# Altium PCB AUC3_V1.3_170103.PcbDoc
Units mm, origin at the board's own origin, x right, y up, seen from the top; angles counter-clockwise.
Board outline 47.4 x 19 mm, 4 copper layers (Top Layer, Mid-Layer 1, Mid-Layer 2, Bottom Layer); 54 components, 40 nets, 162 pads, 93 vias.
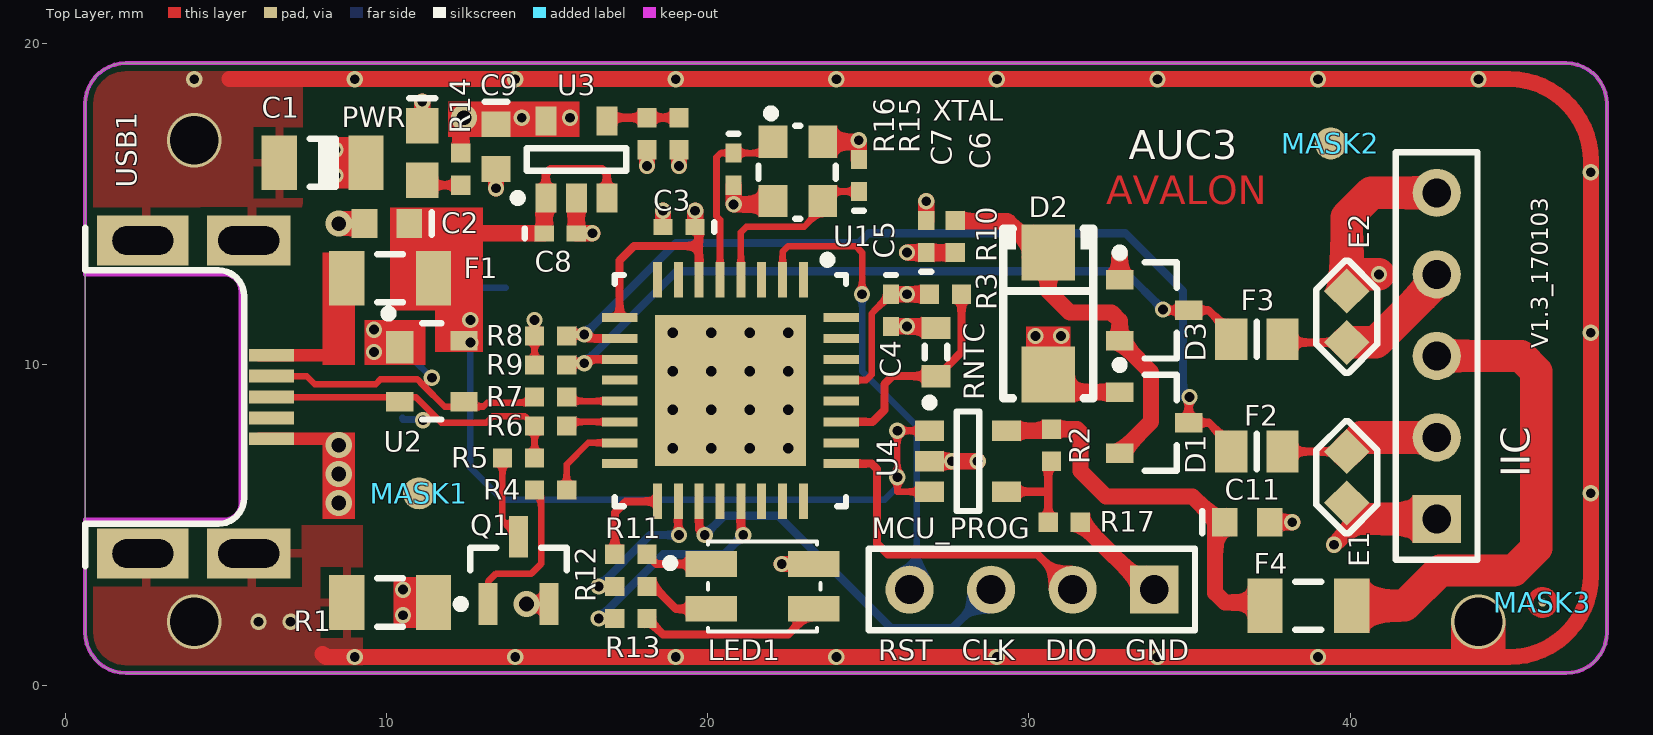
[diagram p0: Top Layer view]
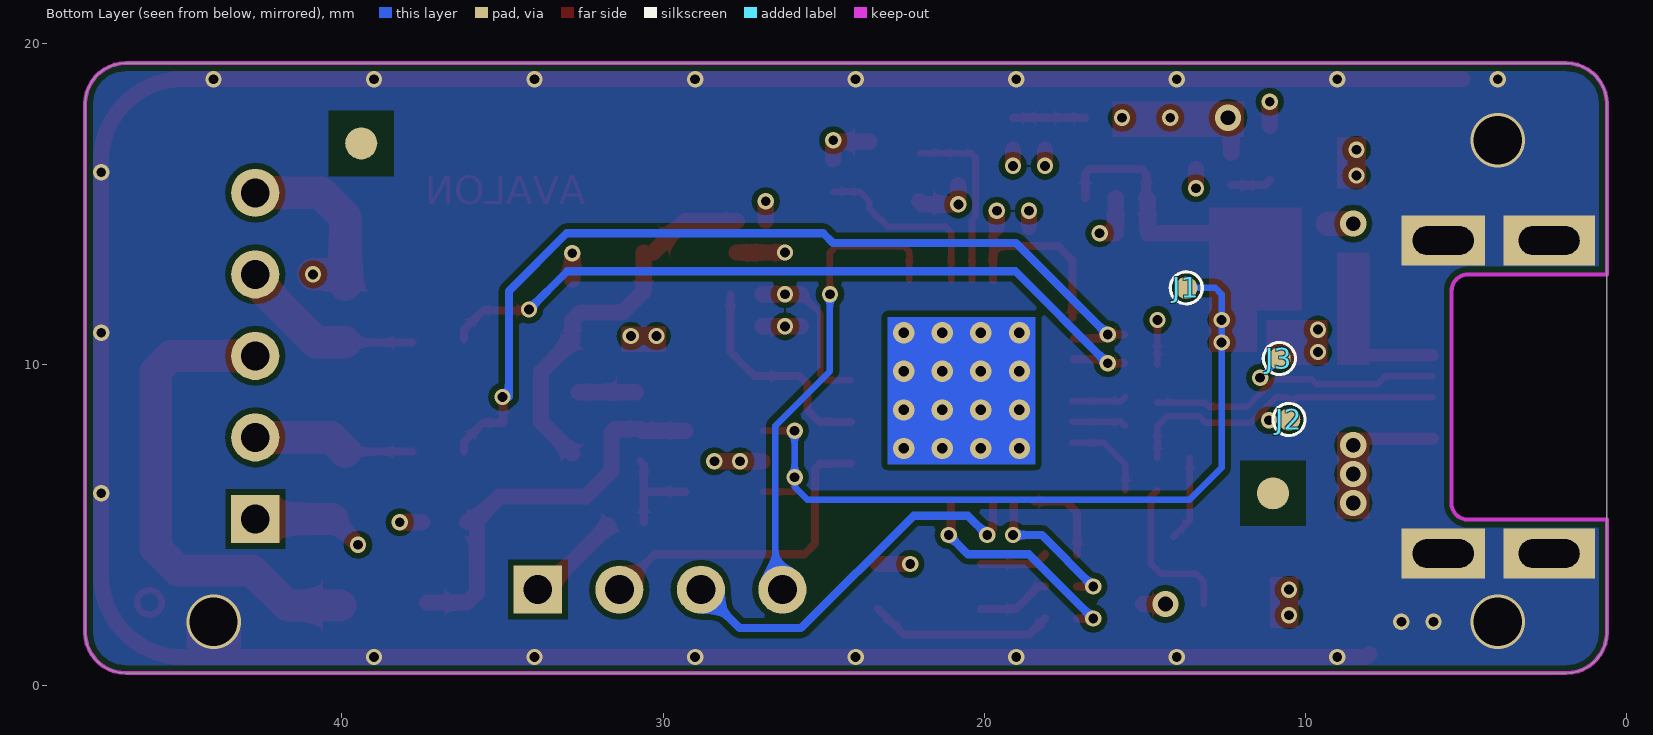
[diagram p1: Bottom Layer view, seen from below]
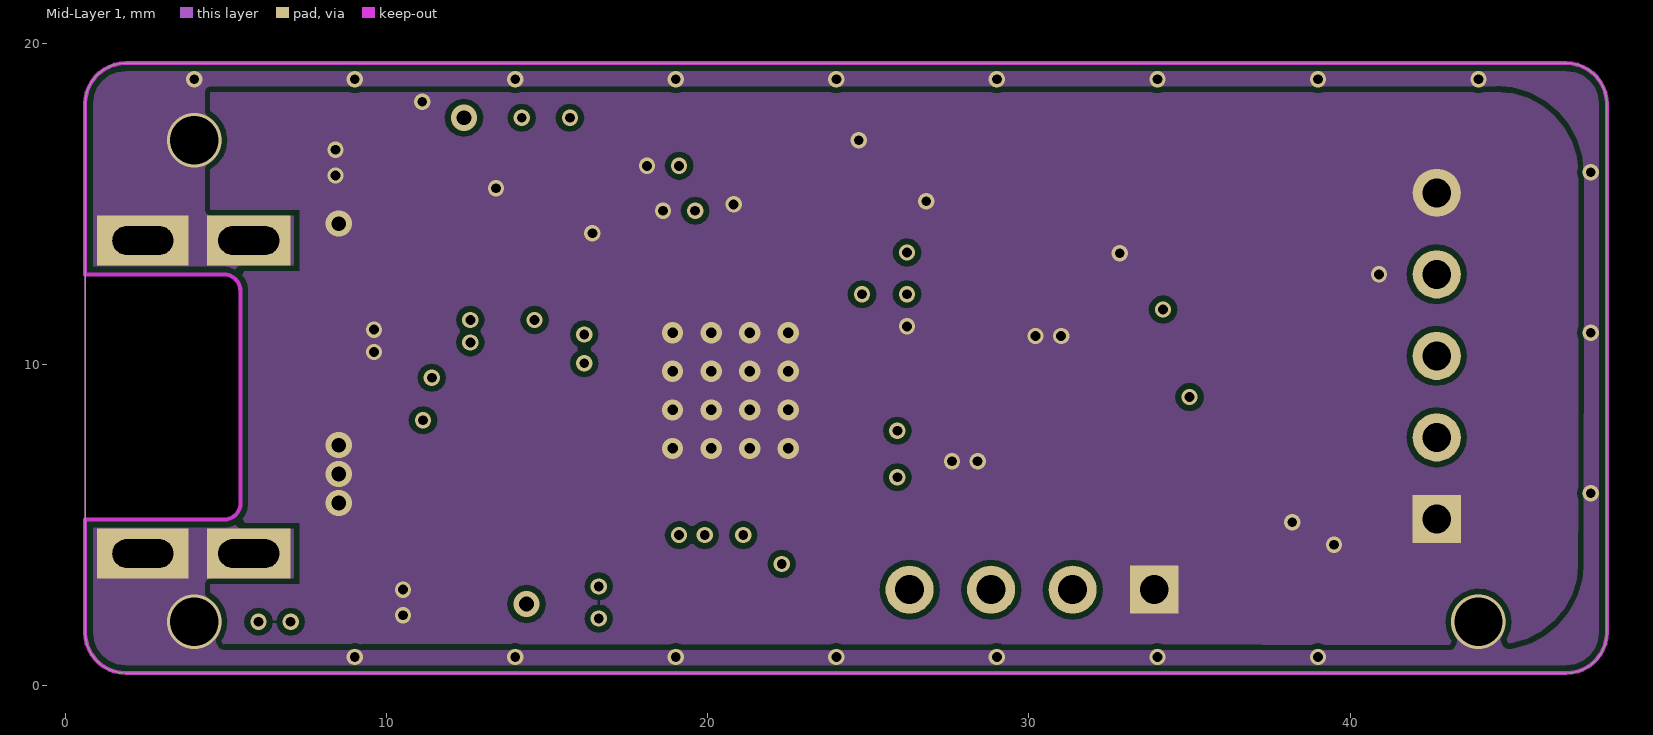
[diagram p2: Mid-Layer 1]
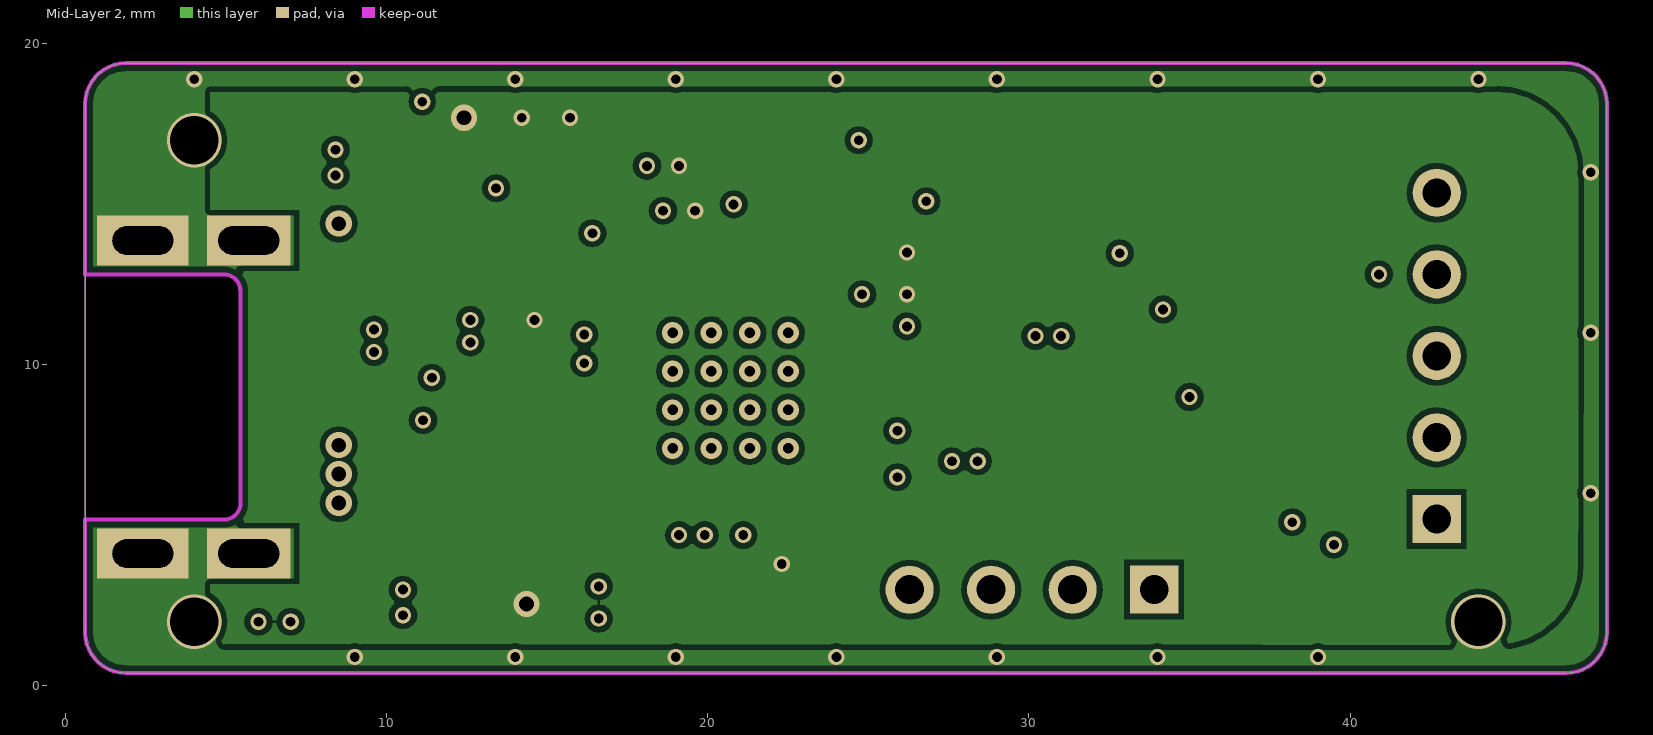
[diagram p3: Mid-Layer 2]

## Layer stack, top to bottom
Top Solder: solder mask 0.0102, Solder Resist, Dk 3.5
Top Layer: signal copper 0.0356
Dielectric 1: dielectric 0.32, FR-4, Dk 4.8
Mid-Layer 1: signal copper 0.0356
Dielectric2: dielectric 0.32, FR-4, Dk 4.8
Mid-Layer 2: signal copper 0.0356
Dielectric3: dielectric 0.32, FR-4, Dk 4.8
Bottom Layer: signal copper 0.0356
Bottom Solder: solder mask 0.0102, Solder Resist, Dk 3.5

## Board outline
0.6,1.67 0.6,18.13 cw(c1.87,18.13) 1.87,19.4 46.73,19.4 cw(c46.73,18.13) 48,18.13 48,1.67 cw(c46.73,1.67) 46.73,0.4 1.87,0.4 cw(c1.87,1.67)

## Design rules (kind name [scope] priority, off if disabled: settings)
Clearance [All] p1: gap=0.178
ComponentClearance [All] p1: gap=0 collisioncheckmode=3 verticalgap=0.254 showdistances=FALSE
HoleSize [All] p1: absolutevalues=TRUE maxlimit=25.4 minlimit=0.254 maxpercent=80.000 minpercent=20.000
PolygonConnect PolygonConnect_6 [IsVia] p1: connectstyle=Direct reliefconductorwidth=0.254 reliefentries=4 polygonreliefangle="90 Angle" airgapwidth=0.254
PolygonConnect PolygonConnect_5 [All vs IsNamedPolygon('SGND1')] p2: connectstyle=Direct reliefconductorwidth=0.254 reliefentries=4 polygonreliefangle="90 Angle" airgapwidth=0.254
PolygonConnect PolygonConnect_4 [All vs IsNamedPolygon('SGND2')] p3: connectstyle=Direct reliefconductorwidth=0.254 reliefentries=4 polygonreliefangle="90 Angle" airgapwidth=0.254
PolygonConnect PolygonConnect_3 [All vs IsNamedPolygon('SGNDB')] p4: connectstyle=Direct reliefconductorwidth=0.254 reliefentries=4 polygonreliefangle="90 Angle" airgapwidth=0.254
PolygonConnect PolygonConnect_2 [All vs IsNamedPolygon('GND')] p5: connectstyle=Direct reliefconductorwidth=0.254 reliefentries=4 polygonreliefangle="90 Angle" airgapwidth=0.254
PolygonConnect PolygonConnect_1 [All vs IsNamedPolygon('VCC3V3')] p6: connectstyle=Direct reliefconductorwidth=0.254 reliefentries=4 polygonreliefangle="90 Angle" airgapwidth=0.254
PolygonConnect [All] p7: connectstyle=Relief reliefconductorwidth=0.254 reliefentries=4 polygonreliefangle="90 Angle" airgapwidth=0.254
RoutingVias [All] p1: holewidth=0.711 width=1.27 viastyle="Through Hole" minholewidth=0.305 minwidth=0.508 maxholewidth=7.112 maxwidth=12.7
SilkToSilkClearance [All] p1: silktosilkclearance=0.025
SilkToSolderMaskClearance [IsPad] p1: minsilkscreentomaskgap=0.025 clearancetoexposedcopper=TRUE
SolderMaskExpansion [All] p1: expansion=0.102
Width [All] p1: maxlimit=25.4 minlimit=0.152 preferedwidth=0.254 midlayer1_minwidth=0.178 midlayer2_minwidth=0.178 minimp=50.000000 maximp=50.000000 favimp=50.000000
26 further rules are at their usual default settings.

## Components (designator, comment, footprint, x,y, rotation, side; value= is the part's Value field where it differs from the comment)
C1 "4700pF" CAPC3216L 8,16.3 r180 top
C2 "4.7uF" CAPC1608L 10,14.4 r180 top
C3 "0.1uF" CAPC1005L 19.1,14.3 r180 top
C4 "0.1uF" CAPC1005L 25.7,11.7 r270 top
C5 "0.1uF" CAPC1005L 26.8,14 r90 top
C6 "10pF" CAPC1005L 24.7,15.9 r90 top
C7 "10pF" CAPC1005L 20.8,16.1 r270 top
C8 "0.1uF" CAPC1005L 15.4,14.1 r0 top
C9 "4.7uF" CAPC1608L 13.4,16.8 r270 top
C11 "4.7uF" CAPC1608L 36.8,5.1 r0 top
D1 "BAV99" SOT-23_L 33.9,8.2 r0 top
D2 "D Zener" DO-214AC 30.6,11.6 r90 top
D3 "BAV99" SOT-23_L 33.9,11.7 r0 top
E1 "ESD Pattern" ESD 39.9,6.5 r90 top
E2 "ESD Pattern" ESD 39.9,11.5 r270 top
F1 "200mA" RESC3216L 10.1,12.7 r0 top
F2 "50mA" RESC2012l 37.1,7.3 r180 top
F3 "50mA" RESC2012l 37.1,10.8 r180 top
F4 "200mA" RESC3216L 38.7,2.5 r180 top
IIC "Header 5" HDR1X50-s 42.7,10.28 r90 top
J1 "TP" TP 13.7,12.4 r180 bottom
J2 "TP" TP 10.5,8.3 r180 bottom
J3 "TP" TP 10.8,10.2 r180 bottom
LED1 "LED RGB SMD" LED3528RGB 21.7,3.1 r0 top
MASK1 "MASK" MASK_L 11,6 r90 top
MASK2 "MASK" MASK_L 39.4,16.9 r90 top
MASK3 "MASK" MASKTEST 46,2.6 r90 top
MCU_PROG "Header 4" HDR1X4 33.9,3 r180 top (schematic designator MCU_PROG1)
PWR "LED3" CD1608-0603 11.1,16.6 r90 top
Q1 "MMBT3906" SOT23_N 14.1,3.6 r90 top
R1 "1M" RESC3216L 10.1,2.6 r0 top
R2 "28.7K" RESC1005L 30.7,7.5 r90 top
R3 "10K" RESC1005L 27.4,12.2 r0 top
R4 "10K" RESC1005L 15.1,6.1 r0 top
R5 "1.5K" RESC1005L 14.1,7.1 r180 top
R6 "33R" RESC1005L 15.1,8.1 r0 top
R7 "33R" RESC1005L 15.1,9 r0 top
R8 "200R" RESC1005L 15.1,10.9 r180 top
R9 "200R" RESC1005L 15.1,10 r180 top
R10 "100K" RESC1005L 27.7,14 r90 top
R11 "200R" RESC1005L 17.6,4.1 r0 top
R12 "200R" RESC1005L 17.6,3.1 r0 top
R13 "200R" RESC1005L 17.6,2.1 r0 top
R14 "200R" RESC1005L 12.3,16.1 r270 top
R15 "28.7K" RESC1005L 19.1,17.2 r270 top
R16 "9.1K" RESC1005L 18.1,17.2 r90 top
R17 "9.1K" RESC1005L 31.1,5.1 r180 top
RNTC "10K" RESC1608L 27.1,10.4 r90 top (schematic designator RNTC1)
U1 "LPC11U1x" HVQFN33 20.7,9.2 r270 top
U2 "PRTR5V0U2X" SOT143B_L 11.4,9.8 r0 top
U3 "LDO" SOT23-5AL 15.9,16.4 r90 top
U4 "LDO" SOT23-5AL 28.1,7 r0 top
USB1 "0481900001" USB_MICRO_B2 0.6,9 r270 top
XTAL "Crystal" XO2520 22.8,16 r270 top (schematic designator XTAL1)

## Footprints (in the part's own frame and the unit in brackets; to place one, negate y for a bottom-side part, rotate by r counter-clockwise, add the part's x,y. Pads: shape width x height; smd on the part's side, far side on the other; paste and mask are expansions set on the pad)
CAPC1005L [mm] "Chip Capacitor, Body 1.0x0.5mm, IPC High Density"
  rect 0.6x0.5 smd: 1(-0.5,0) 2(0.5,0)
  silkscreen extent -1.1,-0.15 -1.1,0.15, body extent -0.55,-0.3 0.55,0.3, height 0.6
CAPC1608L [mm] "Chip Capacitor, Body 1.6x0.8mm, IPC High Density"
  rect 0.8x0.9 smd: 1(-0.7,0) 2(0.7,0)
  silkscreen extent -1.4,-0.35 -1.4,0.35, body extent -0.87,-0.48 0.87,0.48, height 0.85
CAPC3216L [mm] "Chip Capacitor, Body 3.2x1.6mm, IPC High Density"
  rect 1.1x1.7 smd: 1(-1.35,0) 2(1.35,0)
  silkscreen extent -0.4,-0.75 0.4,0.75, body extent -1.7,-0.9 1.7,0.9, height 1.35
CD1608-0603 [mm] "Chip Diode; Body 1.6 x 0.8 mm (LxW typ)"
  rect 1.1x1 smd: 1(-0.85,0) 2(0.85,0)
  silkscreen extent 1.7,-0.4 1.7,0.4
DO-214AC [mm] "Plastic case  JEDEC DO-214  similar to SMA"
  rect 1.74x1.68 smd: 1(-1.9,0) 2(1.9,0)
  silkscreen extent -2.64,-1.4 2.64,1.4, body extent -2.77,-1.53 2.77,1.53, height 2.29
ESD [mm]
  rect 1x1 smd rot 45 paste-0.5: 1(-0.8,0) 2(0.8,0)
  silkscreen extent -1.75,-0.95 1.75,0.95
HDR1X4 [mm] "Connector; Header; 4 Position"
  rect 1.5x1.5 hole 0.9: 1(0,0)
  round 1.5 hole 0.9: 2(2.54,0) 3(5.08,0) 4(7.62,0)
  silkscreen extent -1.27,-1.27 8.89,1.27
HDR1X50-s [mm] "Connector; Header; 4 Position"
  rect 1.5x1.5 hole 0.9: 1(-5.08,0)
  round 1.5 hole 0.9: 2(-2.54,0) 3(0,0) 4(2.54,0) 5(5.08,0)
  silkscreen extent -6.35,-1.27 6.35,1.27
HVQFN33 [mm]
  rect 1.1x0.28 smd paste-0.025 mask+0.105: 1(-3.45,2.275) 2(-3.45,1.625) 3(-3.45,0.975) 4(-3.45,0.325) 5(-3.45,-0.325) 6(-3.45,-0.975) 7(-3.45,-1.625) 8(-3.45,-2.275) 17(3.45,-2.275) 18(3.45,-1.625) 19(3.45,-0.975) 20(3.45,-0.325) 21(3.45,0.325) 22(3.45,0.975) 23(3.45,1.625) 24(3.45,2.275)
  rect 0.28x1.1 smd paste-0.025 mask+0.105: 9(-2.275,-3.45) 10(-1.625,-3.45) 11(-0.975,-3.45) 12(-0.325,-3.45) 13(0.325,-3.45) 14(0.975,-3.45) 15(1.625,-3.45) 16(2.275,-3.45) 25(2.275,3.45) 26(1.625,3.45) 27(0.975,3.45) 28(0.325,3.45) 29(-0.325,3.45) 30(-0.975,3.45) 31(-1.625,3.45) 32(-2.275,3.45)
  rect 4.7x4.7 smd paste-2.35: 33(0,0)
  silkscreen extent -4.2,-3.6 3.6,3.6, body extent -3.5,-3.5 3.5,3.5, height 1
LED3528RGB [mm]
  rect 1.6x0.8 smd paste-0.025 mask+0.105: 1(-1.6,0.7) 2(1.6,0.7) 3(-1.6,-0.7) 4(1.6,-0.7)
  silkscreen extent -3,-1.4 1.8,1.4, body extent -1.7,-1.4 1.7,1.4, height 1.9
MASK_L [mm]
  round 1 smd paste-0.5: 0(0,0)
  round 1 smd far side paste-0.5: 0(0,0)
  Top Layer pour cut-out: -1.016,1.016 1.016,1.016 1.016,-1.016 -1.016,-1.016
  Bottom Layer pour cut-out: -1.016,1.016 1.016,1.016 1.016,-1.016 -1.016,-1.016
MASKTEST [mil]
  round 10 smd paste-5 mask+3: 0(0,0)
  Top Layer circle w8: c0,0 r15
RESC1005L [mm] "Chip Resistor, Body 1.1x0.5mm, IPC High Density"
  rect 0.6x0.6 smd: 1(-0.5,0) 2(0.5,0)
  body extent -0.55,-0.3 0.55,0.3, height 0.4
RESC1608L [mm] "Chip Resistor, Body 1.6x0.8mm, IPC High Density"
  rect 0.7x0.9 smd: 1(-0.75,0) 2(0.75,0)
  silkscreen extent -0.2,-0.35 0.2,0.35, body extent -0.85,-0.48 0.85,0.48, height 0.6
RESC2012l [mm] "Chip Resistor, Body 2.0x1.3mm, IPC High Density"
  rect 1x1.3 smd: 1(-0.8,0) 2(0.8,0)
  silkscreen extent 0,-0.55 0,0.55, body extent -1.07,-0.7 1.07,0.7, height 0.65
RESC3216L [mm] "Chip Resistor, Body 3.2x1.6mm, IPC High Density"
  rect 1.1x1.7 smd: 1(-1.35,0) 2(1.35,0)
  silkscreen extent -0.4,-0.75 0.4,0.75, body extent -1.68,-0.87 1.68,0.87, height 0.71
SOT23-5AL [mm] "SOT23, 5-Leads, Body 2.9x1.6mm, Pitch 0.95mm, Lead Span 2.8mm, IPC High Density"
  rect 0.9x0.65 smd: 1(-1.2,0.95) 2(-1.2,0) 3(-1.2,-0.95) 4(1.2,-0.95) 5(1.2,0.95)
  silkscreen extent -1.32,-1.55 0.35,1.95, body extent -0.9,-1.55 0.9,1.55, height 1.45
SOT23_N [mm] "SOT23, 3-Leads, Body 2.9x1.3mm, Pitch 0.95mm, Lead Span 2.3mm, IPC Medium Density"
  rect 1.3x0.6 smd: 1(-1.05,0.95) 2(-1.05,-0.95) 3(1.05,0)
  silkscreen extent -1.17,-1.5 0.7,1.92, body extent -0.7,-1.5 0.7,1.5, height 1.1
SOT143B_L [mm] "SOT143, 4-Leads, Body 2.9x1.3mm, Pitch 1.9mm, Lead Span 2.3mm, IPC High Density"
  rect 0.85x1 smd: 1(-1,0.75)
  rect 0.85x0.6 smd: 2(-1,-0.95) 3(1,-0.95) 4(1,0.95)
  silkscreen extent -1.47,-1.5 0.3,1.92, body extent -0.7,-1.52 0.7,1.52, height 1.1
SOT-23_L [mm] "SOT23, 3-Leads, Body 2.9x1.3mm, Pitch 0.95mm, Lead Span 2.3mm, IPC High Density"
  rect 0.85x0.6 smd: 1(-1.075,0.95) 2(-1.075,-0.95) 3(1.075,0)
  silkscreen extent -1.2,-1.5 0.7,1.92, body extent -0.7,-1.5 0.7,1.5, height 1.11
TP [mm]
  round 0.7 smd: 1(0,0)
  silkscreen extent -0.5,-0.5 0.5,0.5
USB_MICRO_B2 [mm]
  rect 0.4x1.4 smd paste-0.025 mask+0.102: 1(-1.3,5.8) 2(-0.65,5.8) 3(0,5.8) 4(0.65,5.8) 5(1.3,5.8)
  rect 1.56x2.85 hole 0.9 slot 1.9 at 90 deg: MH1(-4.875,1.8) MH2(4.875,1.8)
  rect 1.56x2.6 hole 0.9 slot 1.9 at 90 deg: MH3(-4.875,5.1) MH4(4.875,5.1)
  Keep-Out Layer board cut-out: -3.811,0 -3.82,4.322 -3.668,4.688 -3.5,4.801 -3.302,4.84 3.302,4.84 3.5,4.801 3.668,4.688 3.781,4.52 3.82,4.322 3.811,0
  silkscreen extent -5.28,0 5.28,4.95
XO2520 [mm] "SMD Crystal"
  rect 1x0.9 smd: 1(-0.95,-0.775) 2(0.9,-0.775) 3(0.9,0.775) 4(-0.95,0.775)
  silkscreen extent -1.96,-1.23 1.45,1.17, body extent -1.25,-1.03 1.25,0.97, height 1

## Part data
C1 C2 C3 C4 C5 C6 C7 C8 C9 C11: library part "Cap Semi", "Capacitor (Semiconductor SIM Model)"
D1 D3: "Silicon Switching Diode Array for High-Speed Switching"
D2: "Zener Diode"
E1 E2: library part ESD
F1 F2 F3 F4 R1 R2 R3 R4 R5 R6 R7 R8 R9 R10 R11 R12 R13 R14 R15 R16 R17 RNTC: library part Res3, "Resistor"
IIC: "Header, 5-Pin"
LED1: library part LED3528RGB
MCU_PROG: "Header, 4-Pin"
PWR: "Typical GREEN SiC LED"
Q1: "PNP Switching Transistor"
U1: "32-bit ARM Cortex-M0 microcontroller"
U2: "Ultra low capacitance double rail-to-rail ESD protection diode"
U3 U4: library part RT9187C, "600mA, Ultra-Low Dropout, CMOS Regulatorout Bypass Capacitor CMOS LDO Regulator"
USB1: "USB On-The-Go (OTG) Mini-B Receptacle, Right Angle, SMT, 0.80mm (.031\") Pitch, Solder Tabs with Back Cover, Recessed Type"
XTAL: library part "Crystal SMD"

## Via types
v1: diameter 0.508, hole 0.305, Top Layer to Bottom Layer, tented both sides, 68 vias
v2: diameter 0.66, hole 0.33, Top Layer to Bottom Layer, tented both sides, 16 vias
v3: diameter 0.813, hole 0.457, Top Layer to Bottom Layer, tented both sides, 6 vias
v4: diameter 1.7, hole 1.5, Top Layer to Bottom Layer, tented both sides, 3 vias

## Nets (pads, with @x,y where several pads share a name; then routed paths per layer and width w, separated by ;. In a path a pad name is that pad's centre, name@x,y a point inside that pad or via, vN(x,y) a via of type N, cw(c..) or ccw(c..) an arc to the next point about the centre after c; other vN are vias at no path point)
3V3_OUT: F4.1 IIC.3 | length 15.3
  Top Layer w1: F4.1 41.7,2.5 42.8,3.6 45.1,3.6 45.8,4.3 45.8,9.8 45.32,10.28 IIC.3
AD7: R3.2 RNTC.1 U1.27 | length 6.9
  Top Layer w0.254: U1.27 25.125,8.225 25.5,8.6 25.5,9.4 25.75,9.65 RNTC.1 ; RNTC.1@27.15,9.65 27.5,10 27.9,10.4 R3.2
FP_I2C_SCL: E1.2 F2.1 IIC.2 | length 5
  Top Layer w0.254: F2.1@37.8,7.3 E1.2@39.8,7.3
  Top Layer w1.016: E1.2 40.34,7.74 IIC.2
FP_I2C_SDA: E2.2 F3.1 IIC.4 | length 5.8
  Top Layer w0.254: F3.1@37.8,10.7 E2.2@39.8,10.7
  Top Layer w1.016: E2.2 40.8,10.7 42.7,12.6 IIC.4
GND: C1.1 C2.2 C3.2 C4.2 C5.2 C6.2 C7.2 C8.2 C9.2 C11.2 D1.1 D2.1 D3.1 E1.1 E2.1 IIC.1 IIC.5 MCU_PROG.1 PWR.2 R1.2 R16.1 R17.1 RNTC.2 U1.33 U2.1 U3.2 U4.2 USB1.5 XTAL.2 XTAL.4 | length 29.4
  Top Layer w0.381: USB1.5@6.025,7.7 v3@8.2,7.7
  Top Layer w0.508: PWR.2 v1(11.1,18.2) ; v1(13.4,15.5) C9.2 ; U3.2 C8.2 v1(16.4,14.1) ; v1(18.1,16.2) R16.1 ; C3.2 v1(18.6,14.8) ; C7.2 v1(20.8,15) 21.925,15 XTAL.2 ; XTAL.4 24.7,16.95 C6.2 ; C4.2 v1(26.2,11.2) RNTC.2@26.9,11.2 ; C5.2 v1(26.8,15.1) ; U4.2 v1(28.4,7) ; D2.1@30.85,9.15 D1.1@32.625,9.15 ; R17.1@31.7,5 33.7,3 MCU_PROG.1 ; D3.1 v1(32.825,13.475) ; C11.2 v1(38.2,5.1) ; v1(39.5,4.4) 40.3,5.2
  Top Layer w0.762: v3(8.5,14.4) C2.2
  Top Layer w1: 40.3,5.2 IIC.1
  Top Layer w1.016: E2.1@39.9,12.5 39.9,14.6 40.66,15.36 IIC.5 ; 40.32,12.82 v1(40.9,12.82)
  other v1: 10.5,2.2 10.5,3 27.6,7 9.6,10.4 30.2,10.9 31,10.9 9.6,11.1 8.4,15.9 8.4,16.7 24.7,17
  other v2: 18.9,7.4 20.1,7.4 21.3,7.4 22.5,7.4 18.9,8.6 20.1,8.6 21.3,8.6 22.5,8.6 18.9,9.8 20.1,9.8 21.3,9.8 22.5,9.8 18.9,11 20.1,11 21.3,11 22.5,11
  other v3: 8.5,5.7 8.5,6.6 8.5,7.5
I2C_SCL: D1.3 F2.2 R8.1 U1.10 | length 28.2
  Top Layer w0.254: R8.1@15.65,10.95 v1(16.15,10.95) 16.275,10.825 U1.10@17.2,10.825 ; v1(35,9) 34.975,8.975 D1.3 35.6,8.2 36.2,7.6 F2.2@36.2,7.3
  Bottom Layer w0.254: v1(16.15,10.95) 19,13.8 24.71,13.8 25.01,14.1 33,14.1 34.8,12.3 v1@34.8,9
I2C_SDA: D3.3 F3.2 R9.1 U1.11 | length 23.9
  Top Layer w0.254: R9.1@15.65,10.05 v1(16.15,10.05) 16.275,10.175 U1.11@17.2,10.175 ; v1@34.2,11.7 D3.3 35.6,11.7 36.2,11.1 F3.2@36.2,10.8
  Bottom Layer w0.254: v1(16.15,10.05) 19.016,12.916 32.984,12.916 v1(34.175,11.725)
LED_BLUE: R13.1 U1.21 | length 7.2
  Top Layer w0.254: v1(16.6,2.1) R13.1 ; U1.21 21.025,4.775 v1(21.1,4.7)
  Bottom Layer w0.254: v1(16.6,2.1) 18.6,4.1 20.5,4.1 v1(21.1,4.7)
LED_GREEN: R12.1 U1.18 | length 4.7
  Top Layer w0.254: v1(16.6,3.1) R12.1 ; U1.18 19.075,4.725 v1(19.1,4.7)
  Bottom Layer w0.254: v1(16.6,3.1) 18.2,4.7 v1(19.1,4.7)
LED_RED: R11.1 U1.17 | length 2.8
  Top Layer w0.254: R11.1 17.1,5.4 17.45,5.75 U1.17
MISO1: U1.20
MOSI1: U1.12
NetC11_1: C11.1 F4.2 R2.2 U4.5 | length 12.5
  Top Layer w0.5: U4.5 30.65,7.95 R2.2 31.5,8 31.6,7.9 31.6,6.7 32.4,5.9 35.1,5.9 35.8,5.2 35.8,2.9 36.1,2.6 F4.2@37.35,2.6 ; C11.1@36,5.2 C11.1
NetD1_2: D1.2 D2.2 D3.2 R10.2 | length 11.7
  Top Layer w0.508: R10.2@27.7,14.475 29.325,14.475 D2.2@30.3,13.5 ; D2.2 30.6,12.3 31.268,11.632 32.568,11.632 32.825,11.375 D3.2 33.8,9.775 33.8,8.225 D1.2
NetF1_1: F1.1 USB1.1 | length 2.8
  Top Layer w0.381: USB1.1@6.025,10.3 8.8,10.3
NetLED1_1: LED1.1 R11.2 | length 2.1
  Top Layer w0.254: R11.2 18.4,3.8 LED1.1
NetLED1_3: LED1.3 R12.2 | length 2.3
  Top Layer w0.254: R12.2 18.31,3.1 19.01,2.4 LED1.3
NetLED1_4: LED1.4 R13.2 | length 5.7
  Top Layer w0.254: R13.2 18.6,1.6 22.5,1.6 LED1.4
NetPWR_1: PWR.1 R14.2 | length 1.3
  Top Layer w0.254: PWR.1 11.25,15.6 R14.2
NetQ1_1: Q1.1 R4.1 | length 5
  Top Layer w0.203: Q1.1 13.15,3.25 13.4,3.5 14.5,3.5 14.8,3.8 14.8,5.9 R4.1
NetQ1_3: Q1.3 R5.2 | length 2.7
  Top Layer w0.203: R5.2 13.6,5.15 Q1.3
NetR2_1: R2.1 R17.2 U4.4 | length 3.3
  Top Layer w0.254: U4.4 30.55,6.05 30.6,6 ; R17.2 30.6,6 ; R2.1 30.6,6.9 30.6,6
NetR6_2: R6.2 U1.14 | length 1.7
  Top Layer w0.203: R6.2 15.725,8.225 U1.14
NetR7_2: R7.2 U1.13 | length 1.7
  Top Layer w0.203: R7.2 15.725,8.875 U1.13
NetR15_1: R15.1 R16.2 U3.4 | length 2.3
  Top Layer w0.254: U3.4@16.85,17.7 R15.1
RST: MCU_PROG.4 U1.2 | length 14.8
  Top Layer w0.203: U1.2 22.325,13.525 22.5,13.7 24.6,13.7 24.8,13.5 v1(24.8,12.2)
  Bottom Layer w0.203: v1(24.8,12.2) 24.8,9.804 26.5,8.104 26.5,3.22 MCU_PROG.4
S_GND: C1.2 R1.1 USB1.MH1 USB1.MH2 USB1.MH3 USB1.MH4 | length 97.8
  Top Layer w0.5: 5.1,18.9 44.96,18.9 cw(c44.96,16.36) 47.5,16.36 47.5,3.44 cw(c44.96,3.44) 44.96,0.9 8.1,0.9 8,1
  other v1: 9,0.9 14,0.9 19,0.9 24,0.9 29,0.9 34,0.9 39,0.9 6,2 7,2 47.5,6 47.5,11 47.5,16 4,18.9 9,18.9 14,18.9 19,18.9 24,18.9 29,18.9 34,18.9 39,18.9 44,18.9
  other v4: 4,2 44,2 4,17
SCK1: U1.28
SSEL1: U1.1
SWCLK: MCU_PROG.3 U1.19 | length 12.4
  Top Layer w0.254: U1.19 19.725,4.875 v1(19.9,4.7)
  Bottom Layer w0.254: v1(19.9,4.7) 20.5,5.3 22.2,5.3 25.7,1.8 27.62,1.8 MCU_PROG.3 ; MCU_PROG.3@28.7,3.5 MCU_PROG.3@28.82,3.5
SWDIO: MCU_PROG.2 U1.25 | length 10.2
  Top Layer w0.254: U1.25 25.1,6.925 25.263,6.763 25.263,4.437 25.6,4.1 30.26,4.1 MCU_PROG.2
UART_RXD: U1.31
UART_TXD: U1.32
USB_CONNECT: R4.2 U1.15 | length 2.7
  Top Layer w0.203: R4.2 15.6,6.9 16.275,7.575 U1.15
USB_DM: J3.1 R7.1 U2.3 USB1.2 | length 10.4
  Top Layer w0.203: USB1.2@6.025,9.65 7.5,9.65 7.75,9.4 9.65,9.4 9.8,9.55 10.95,9.55 11.125,9.375 ; v1(11.4,9.6) 11.175,9.375 11.125,9.375 ; R7.1@14.6,8.825 13.125,8.825 13,8.7 11.8,8.7 11.125,9.375
  Bottom Layer w0.203: J3.1 v1(11.4,9.6)
USB_DP: J2.1 R5.1 R6.1 U2.2 USB1.3 | length 11.3
  Top Layer w0.203: USB1.3@6.025,9 10.25,9 U2.2 10.55,9 10.9,9 11.375,8.525 ; v1(11.125,8.275) 11.375,8.525 ; R5.1 R6.1 14.3,8.4 13.3,8.4 13.1,8.2 11.7,8.2 11.375,8.525
  Bottom Layer w0.203: J2.1@10.475,8.35 J2.1@10.5,8.35 ; J2.1 11.1,8.3 v1(11.125,8.275)
VCC: C2.1 C8.1 F1.2 J1.1 U2.4 U3.1 U3.3 U4.1 U4.3 | length 34.3
  Top Layer w0.203: U4.3 25.9,6.05 v1(25.9,7.95) U4.1
  Top Layer w0.254: U3.1 14.95,15.95 15.1,16.1 16.7,16.1 16.85,15.95 U3.3
  Top Layer w0.508: 11.4,14.1 C8.1 14.9,15.15 U3.1
  Bottom Layer w0.203: J1.1 12.8,12.4 12.6,12.2 v1(12.6,11.4) v1(12.6,10.7) 12.6,6.8 13.6,5.8 25.5,5.8 25.9,6.2 v1(25.9,7.95)
  other v1: 25.9,6.5
VCC3V3: C3.1 C4.1 C5.1 C9.1 LED1.2 Q1.2 R3.1 R8.2 R9.2 R10.1 R14.1 R15.2 U1.6 U1.9 U1.29 U3.5 | length 17.4
  Top Layer w0.2: U1.29 24.925,9.525 25.1,9.7 25.1,11.6 C4.1
  Top Layer w0.203: R9.2 R8.2 v1(14.6,11.4)
  Top Layer w0.254: U1.9 17.25,13.25 17.7,13.7 19.725,13.7 ; C3.1 19.725,14.175 19.725,13.7 ; U1.6 19.725,13.7
  Top Layer w0.508: R14.1 12.3,17.3 ; v3(14.35,2.55) Q1.2 ; v1(19.1,16.2) R15.2 ; C3.1 v1(19.6,14.8) ; v1(22.3,3.8) LED1.2 ; C4.1 v1(26.2,12.2) R3.1 ; v1(26.2,13.5) C5.1 R10.1
  other v1: 14.2,17.7 15.7,17.7
  other v3: 12.4,17.7
XTALIN: C6.1 U1.4 XTAL.3 | length 5.8
  Top Layer w0.203: U1.4 21.025,14.125 21.2,14.3 23,14.3 23.575,14.875 XTAL.3 23.875,15.4 C6.1
XTALOUT: C7.1 U1.5 XTAL.1 | length 5.7
  Top Layer w0.203: U1.5 20.375,14.525 20.267,14.633 20.267,16.467 20.4,16.6 XTAL.1@22,16.6
pads on no net: MASK1.0 MASK2.0 MASK3.0 U1.3 U1.7 U1.8 U1.16 U1.22 U1.23 U1.24 U1.26 U1.30 USB1.4

## Polygon pours and split planes (outlines as drawn)
S_GND on Top Layer "S2" (solid, remove dead copper, pour order 14): 0.5,5 0.5,0.65 9.25,0.65 9.25,3.4 8.975,3.4 9.25,3.4 9.25,5
S_GND on Top Layer "S1" (solid, remove dead copper, pour order 15): 0.5,13 0.5,19.15 7.375,19.15 7.375,15.375 7.375,13
GND on Mid-Layer 1 "GND" (solid, remove dead copper, pour order 10): 4.5,18.5 4.5,1.3 13.5,1.3 44.56,1.3 ccw(c44.56,3.84) 47.1,3.84 47.1,15.96 ccw(c44.56,15.96) 44.56,18.5 33.9,18.5 4.5,18.5
S_GND on Mid-Layer 1 "SGND1" (solid, remove dead copper, pour order 13): 0.5,19.5 0.5,0 48,0 48,19.5 0.5,19.5
VCC3V3 on Mid-Layer 2 "VCC3V3" (solid, remove dead copper, pour order 9): 4.5,18.5 4.5,1.3 13.5,1.3 44.56,1.3 ccw(c44.56,3.84) 47.1,3.84 47.1,15.96 ccw(c44.56,15.96) 44.56,18.5 33.9,18.5 4.5,18.5
S_GND on Mid-Layer 2 "SGND2" (solid, remove dead copper, pour order 12): 0.5,19.5 0.5,0 48,0 48,19.5 0.5,19.5
S_GND on Bottom Layer "SGNDB" (solid, remove dead copper, pour order 11): 0.5,19.5 0.5,0 48,0 48,19.5 0.5,19.5

## Keep-outs
Keep-Out Layer:
  lines w0.127: 0.6,3.2 0.6,1.67 ; 0.6,14.9 0.6,18.13 ; 4.9,12.82 cw(c4.911,12.291) 5.44,12.302 5.44,5.698 ; 4.922,5.18 0.6,5.18 0.6,1.67 ; 4.922,12.82 0.6,12.82 0.6,18.13 ; 4.935,5.18 ccw(c4.922,5.698) 5.44,5.711 ; 0.6,1.67 ccw(c1.87,1.67) 1.87,0.4 46.73,0.4 ccw(c46.73,1.67) 48,1.67 48,18.13 ccw(c46.73,18.13) 46.73,19.4 3.6,19.4 1.87,19.4 ccw(c1.87,18.13) 0.6,18.13

## Other copper
Top Layer:
  rectangle net GND: 10.2,1.8 11.1,3.4
  rectangle net GND: 8.1,15.5 9,17.1
  rectangle net VCC3V3: 11.9,17.1 16,18.2
  rectangle net GND: 29.9,10.4 31.3,11.2
  rectangle net VCC: 10.1,11.7 13,14.9
  rectangle net NetF1_1: 8,10 9,13.5
  rectangle net GND: 8,5.2 9,7.9
  rectangle net VCC: 11.5,10.4 13,11.8
  rectangle net GND: 9.3,10 11.2,11.4
  rectangle net S_GND: 43.15,0.65 44.85,2.05
  text "AVALON" at 32.4,15 h0.89
Bottom Layer:
  rectangle net GND: 18.4,6.9 23,11.5

## Silkscreen, mask and mechanical layers (free items; w line width, h text height)
Top Overlay:
  text "AUC3" at 33.1,16.4 h0.9
  text "V1.3_170103" at 46.35,10.525 h0.9 r90
  text "RST" at 25.3,0.8 h0.64
  text "CLK" at 27.9,0.8 h0.64
  text "DIO" at 30.5,0.8 h0.64
  text "GND" at 33,0.8 h0.64
Top Solder:
  text "AVALON" at 32.4,15 h0.89